# EAGLE board ONLY_HBRIDGE v3 (EAGLE 9.7.0)
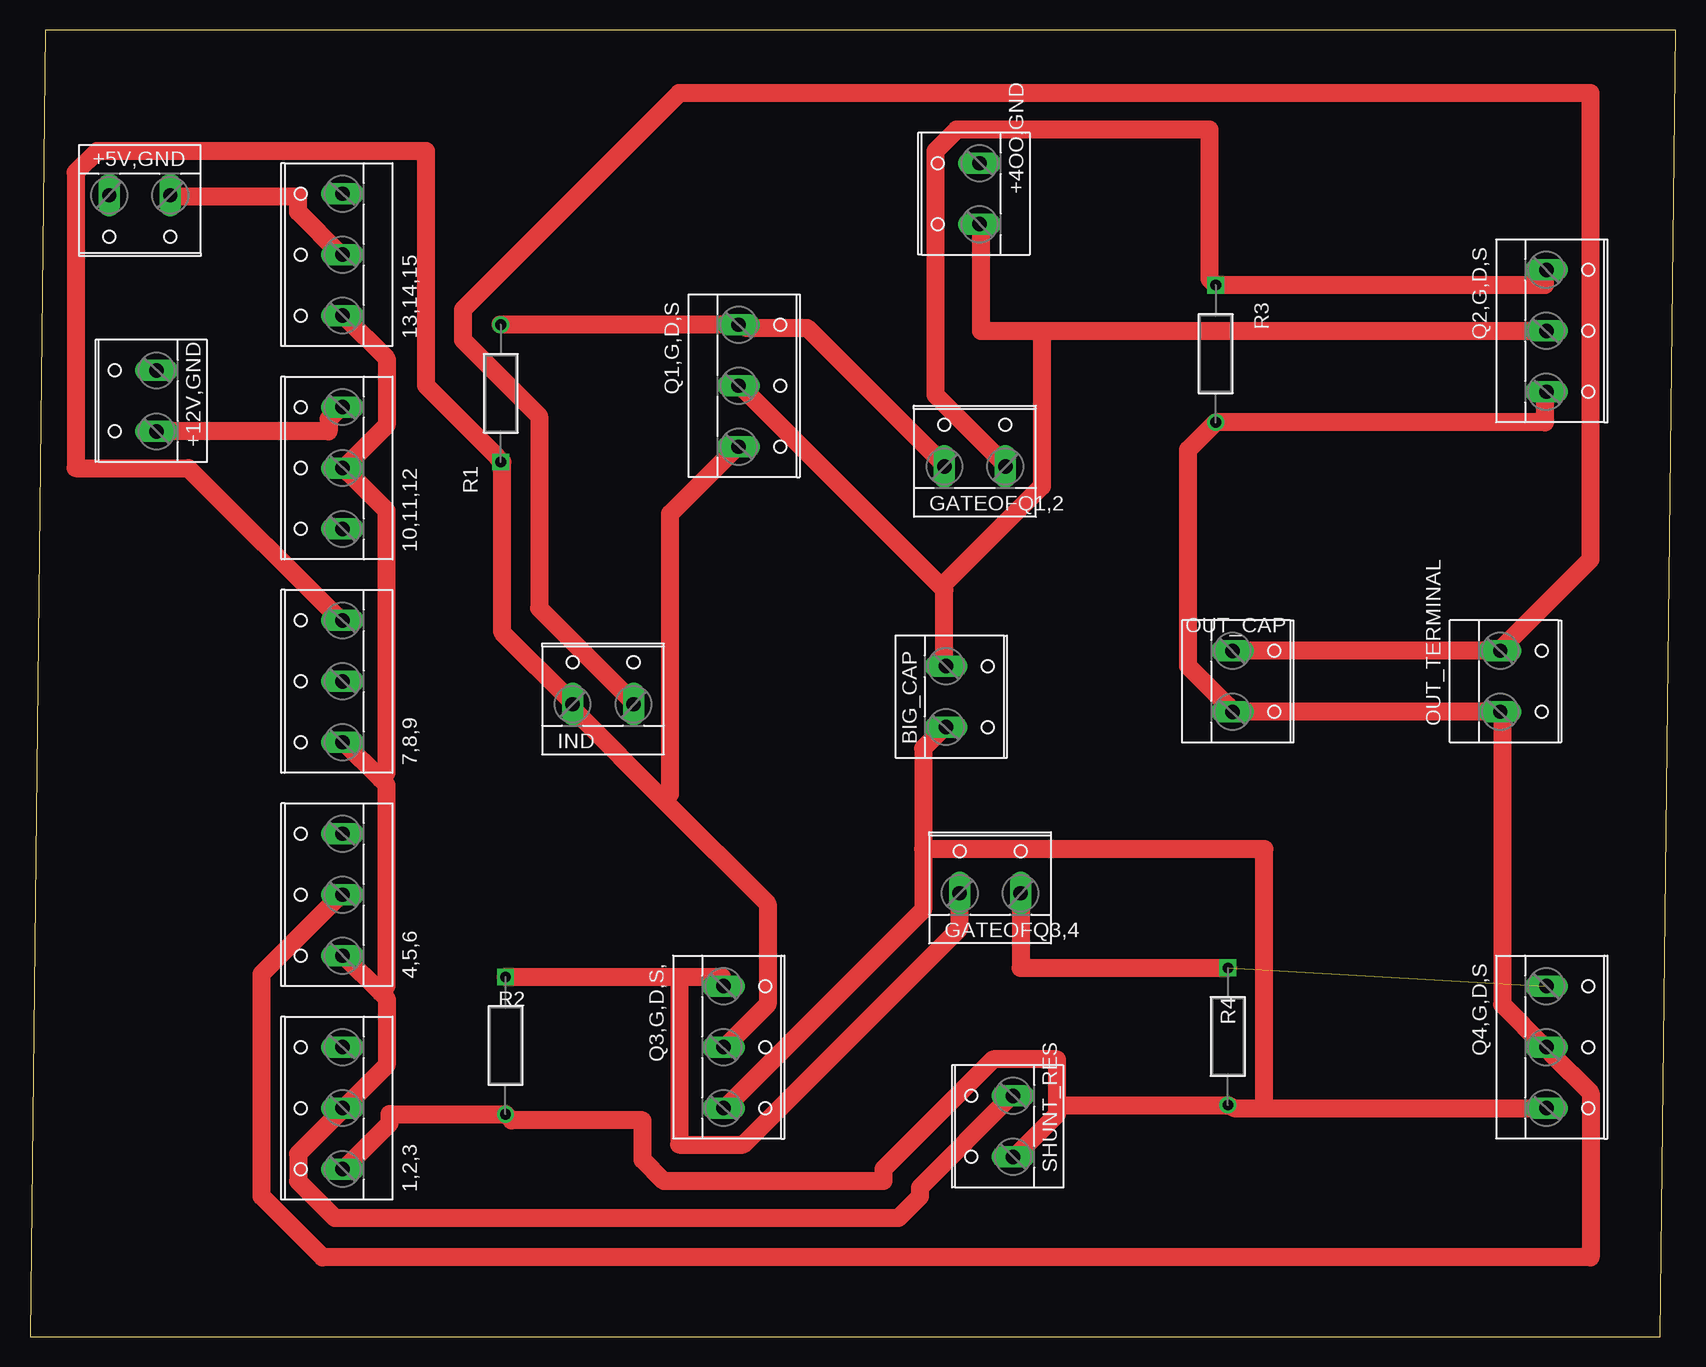
[diagram p0: board, top side]

Size 137.14 x 108.89 mm. Coordinates in mm from the lower left corner, seen from the top.
Outline: 0,0 135.87,0 137.14,108.89 1.27,108.89 0,0
Copper layers (1*16): Top 0.035mm / dielectric 1.5mm / Bottom 0.035mm
Design rules "Fusion Electronics Design Rules": minimum track width 1.5mm, minimum drill 0.35mm, track to track 0.5mm, track to pad 40mil, pad to pad 6mil, via to via 6mil, smd to smd 6mil, copper to edge 40mil, drill to drill 6mil, minimum pad ring 10mil, minimum via ring 8mil, stop-mask expansion 4mil, vias tented up to drill 9999mil, thermal gap 10mil

## Footprints (pad centres in the part's own frame; a part is rotated, then mirrored left to right if it is on the bottom)
W237-133 = drill 1.194 long: 1 -5.08,-0.635; 2 0,-0.635; 3 5.08,-0.635
W237-132 = drill 1.194 long: 1 -2.54,-0.635; 2 2.54,-0.635
STA_CF14_STP = drill 0.889 pad 1.397 square: 1 0,0 | drill 0.889 pad 1.397: 2 11.43,0

## Placement (x,y rotation side)
1,2,3  [W237-133]  25.4,19.05 90 top
4,5,6  [W237-133]  25.4,36.83 90 top
7,8,9  [W237-133]  25.4,54.61 90 top
10,11,12  [W237-133]  25.4,72.39 90 top
13,14,15  [W237-133]  25.4,90.17 90 top
+4OO,GND  [W237-132]  78.49,95.25 90 top
+5V,GND  [W237-132]  9.14,94.49 180 top
+12V,GND  [W237-132]  9.91,77.98 90 top
BIG_CAP  [W237-132]  76.96,53.34 270 top
GATEOFQ1,2  [W237-132]  78.74,73.15 0 top
GATEOFQ3,4  [W237-132]  80.01,37.59 0 top
IND  [W237-132]  47.75,53.34 0 top
OUT_CAP  [W237-132]  100.84,54.61 270 top
OUT_TERMINAL  [W237-132]  123.15,54.62 270 top
Q1,G,D,S  [W237-133]  59.69,79.25 270 top
Q2,G,D,S  [W237-133]  127,83.82 270 top
Q3,G,D,S,  [W237-133]  58.42,24.13 270 top
Q4,G,D,S  [W237-133]  127,24.13 270 top
R1  CF14JT10K0STA_CF14_STP  [STA_CF14_STP]  39.23,72.9 90 top
R2  CF14JT10K0STA_CF14_STP  [STA_CF14_STP]  39.62,29.97 270 top
R3  CF14JT10K0STA_CF14_STP  [STA_CF14_STP]  98.81,87.63 270 top
R4  CF14JT10K0STA_CF14_STP  [STA_CF14_STP]  99.82,30.73 270 top
SHUNT_RES  [W237-132]  81.28,17.53 90 top

## Library data of the parts
1,2,3 4,5,6 7,8,9 10,11,12 13,14,15 +4OO,GND +5V,GND +12V,GND BIG_CAP GATEOFQ1,2 GATEOFQ3,4 IND OUT_CAP OUT_TERMINAL Q1,G,D,S Q2,G,D,S Q3,G,D,S, Q4,G,D,S SHUNT_RES = con-wago-508
R1-R4 = 2024-12-04_14-13-54_Library; COPYRIGHT: Copyright (C) 2024 Ultra Librarian. All rights reserved.; MANUFACTURER_PART_NUMBER: CF14JT10K0; MFR_NAME: Stackpole International

## Nets
N$1: GATEOFQ1,2.1 Q1,G,D,S.1 R1.2
N$2: GATEOFQ1,2.2 Q2,G,D,S.1 R3.1
N$3: 1,2,3.2 4,5,6.1 7,8,9.1 10,11,12.2 13,14,15.1 SHUNT_RES.2
N$4: GATEOFQ3,4.2 Q4,G,D,S.1 R4.1
N$5: GATEOFQ3,4.1 Q3,G,D,S,.1 R2.1
N$6: 1,2,3.1 BIG_CAP.2 Q3,G,D,S,.3 Q4,G,D,S.3 R2.2 R4.2 SHUNT_RES.1
N$7: 13,14,15.2 +5V,GND.1
N$8: 10,11,12.3 +12V,GND.1
N$9: +4OO,GND.1 BIG_CAP.1 Q1,G,D,S.2 Q2,G,D,S.2
N$10: 7,8,9.3 IND.1 Q1,G,D,S.3 Q3,G,D,S,.2 R1.1
N$11: IND.2 OUT_CAP.1 OUT_TERMINAL.1
N$12: 4,5,6.2 OUT_CAP.2 OUT_TERMINAL.2 Q2,G,D,S.3 Q4,G,D,S.2 R3.2

## Tracks (layer width: path | path; a pad name or v marks a point on that pad's centre or on a via)
N$1
  Top 1.5: R1.2 Q1,G,D,S.1 59.69,84.07 64.77,84.07 76.2,72.64 GATEOFQ1,2.1
N$2
  Top 1.5: Q2,G,D,S.1 126.24,88.9 126.24,87.63 R3.1 98.3,88.14 98.3,100.58 77.22,100.58 75.44,98.81 75.44,78.49 81.28,72.64 GATEOFQ1,2.2
N$3
  Top 1.5: 13,14,15.1 26.16,85.09 29.72,81.53 29.72,75.95 26.16,72.39 10,11,12.2 26.67,71.88 29.72,68.83 29.72,46.99 29.21,46.48 | 29.21,28.7 26.16,31.75 4,5,6.1 | 29.21,28.7 29.72,28.19 29.72,22.61 26.16,19.05 1,2,3.2 25.65,18.54 22.35,15.24 22.35,12.95 25.4,9.91 72.39,9.91 74.17,11.68 74.17,12.45 81.79,20.07 SHUNT_RES.2 | 29.21,46.48 29.72,45.97 29.72,29.21 29.21,28.7 | 29.21,46.48 26.16,49.53 7,8,9.1
N$4  (1 unrouted)
  Top 1.5: R4.1 82.55,30.73 GATEOFQ3,4.2
N$5
  Top 1.5: 54.1,29.97 57.66,29.97 57.66,29.21 Q3,G,D,S,.1 | 54.1,29.97 R2.1 | GATEOFQ3,4.1 77.47,34.04 59.44,16 54.1,16 54.1,29.97
N$6
  Top 1.5: 74.42,40.64 74.42,49.02 76.2,50.8 BIG_CAP.2 | 74.42,40.64 74.42,35.56 57.91,19.05 Q3,G,D,S,.3 | 1,2,3.1 26.16,13.97 29.97,17.78 29.97,18.54 R2.2 40.13,18.03 51.05,18.03 51.05,14.73 52.83,12.95 71.12,12.95 71.12,13.97 80.26,23.11 85.6,23.11 85.6,19.3 | 85.6,19.3 R4.2 100.33,19.05 102.87,19.05 | 85.6,19.3 85.6,18.54 82.04,14.99 SHUNT_RES.1 | 102.87,19.05 Q4,G,D,S.3 | 74.42,40.64 102.87,40.64 102.87,19.05
N$7
  Top 1.5: +5V,GND.1 11.68,95 22.35,95 22.35,93.73 25.91,90.17 13,14,15.2
N$8
  Top 1.5: +12V,GND.1 24.89,75.44 24.89,76.45 25.91,77.47 10,11,12.3
N$9
  Top 1.5: 75.95,62.48 76.2,62.23 76.2,55.88 BIG_CAP.1 | 75.95,62.48 59.18,79.25 Q1,G,D,S.2 | 84.33,83.82 79.25,83.82 79.25,92.71 +4OO,GND.1 | 84.33,83.82 Q2,G,D,S.2 | 75.95,62.48 84.33,70.87 84.33,83.82
N$10
  Top 1.5: 7,8,9.3 25.91,59.69 13.21,72.39 3.81,72.39 3.81,97.03 5.59,98.81 33.02,98.81 33.02,79.25 38.86,73.41 R1.1 39.37,72.9 39.37,58.67 45.21,52.83 IND.1 45.47,52.07 52.83,44.7 | 52.83,44.7 61.47,36.07 61.47,27.69 57.91,24.13 Q3,G,D,S,.2 | Q1,G,D,S.3 58.93,74.17 53.34,68.58 53.34,45.21 52.83,44.7
N$11
  Top 1.5: IND.2 50.29,52.83 42.42,60.71 42.42,76.71 36.07,83.06 36.07,85.6 54.1,103.63 130.05,103.63 130.05,64.77 122.68,57.4 OUT_TERMINAL.1 121.92,57.15 OUT_CAP.1
N$12
  Top 1.5: Q2,G,D,S.3 126.24,78.74 126.24,76.2 R3.2 96.52,73.91 96.52,55.88 99.82,52.58 OUT_CAP.2 121.92,52.07 OUT_TERMINAL.2 122.68,52.07 122.68,27.69 126.24,24.13 Q4,G,D,S.2 126.75,23.62 130.05,20.32 130.05,6.6 24.38,6.6 19.3,11.68 19.3,30.23 25.91,36.83 4,5,6.2